# Allegro board B07_1013.brd
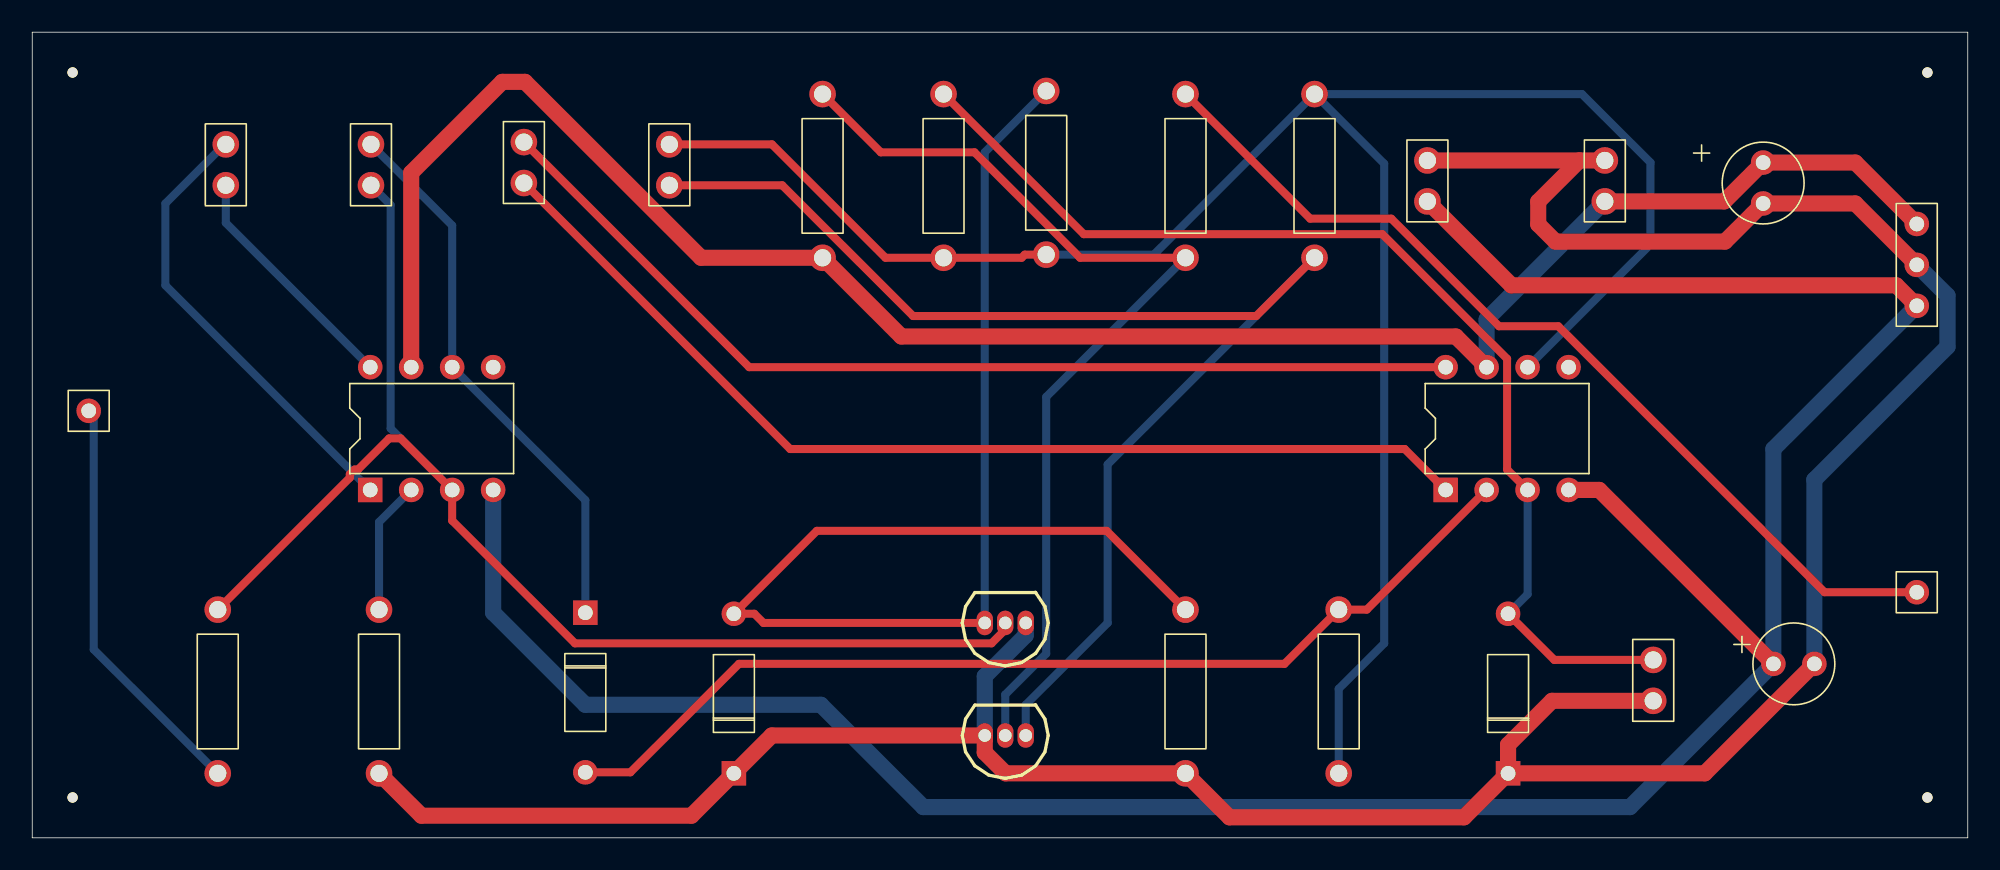
[diagram p0: board, top side]
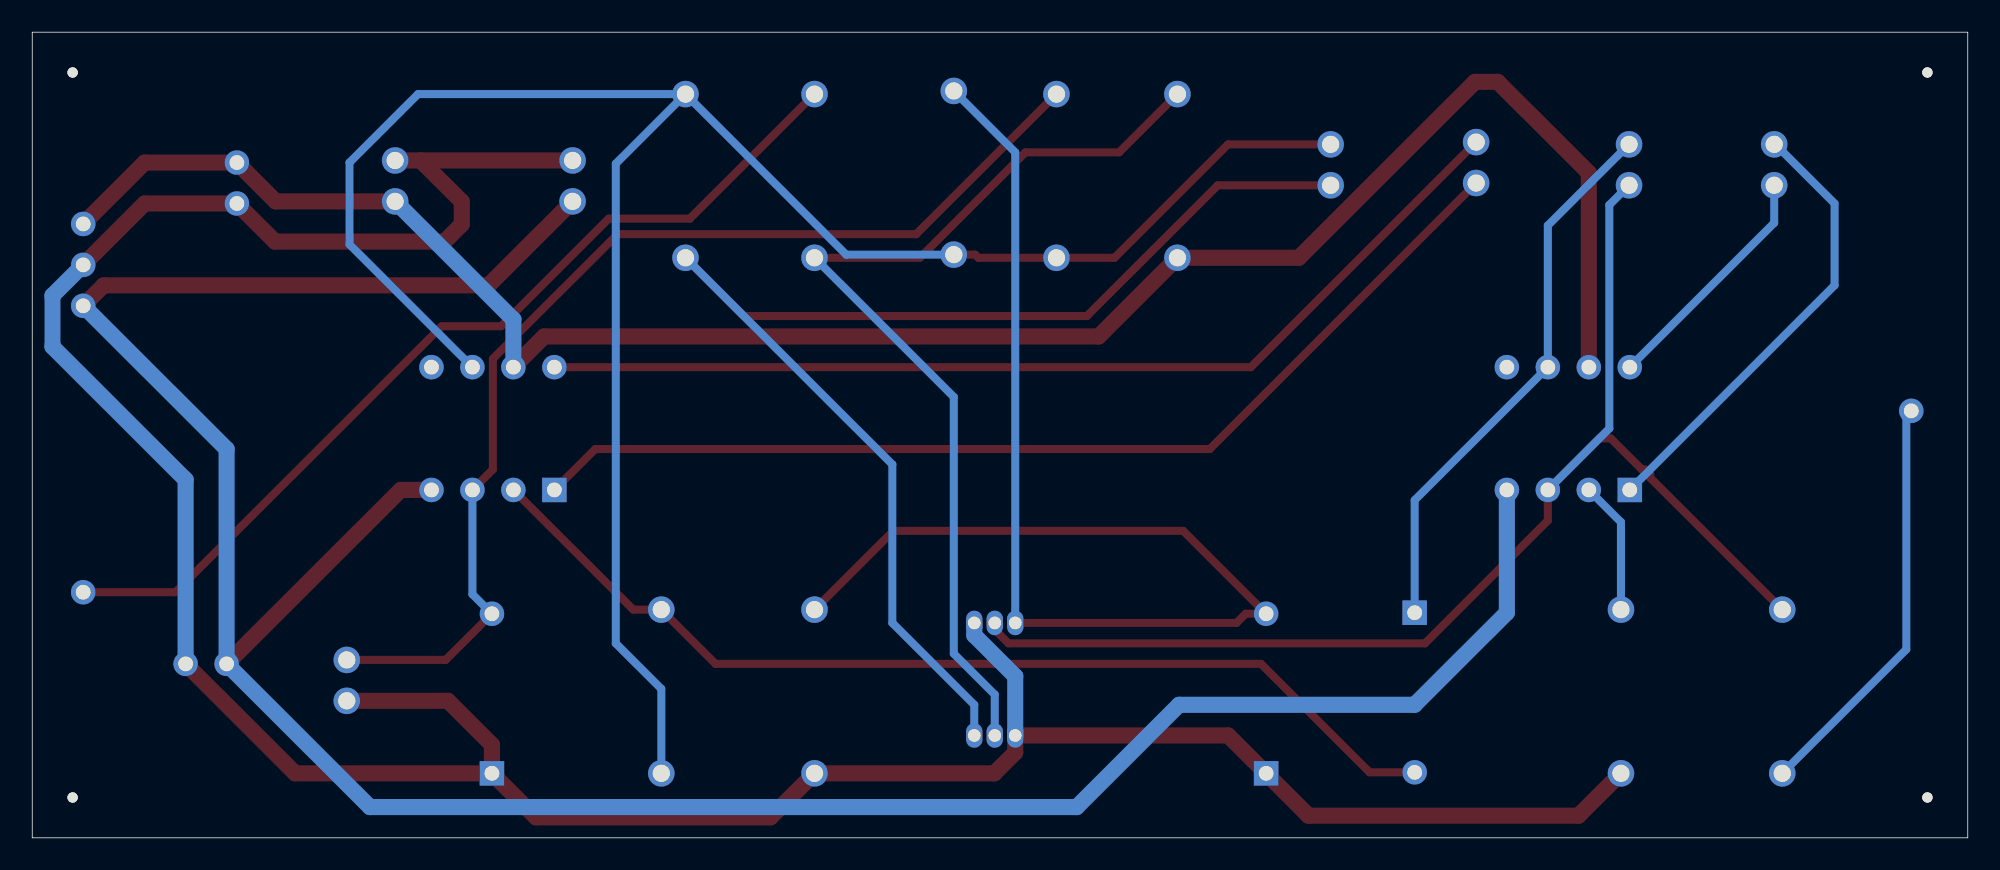
[diagram p1: board, bottom side, seen from below]

Outline 120 x 50 mm; copper layers: TOP, BOTTOM. Coordinates in mm from the lower left corner of the outline.
Outline path: 0,50 0,0 120,0 120,50 0,50

## Design rules (mm)
constraint set DEFAULT: min track width 0.5
nets with their own width: min track width 1; nets +12V -12V GND

## Placement (name value [footprint] x y rotation side)
C1  CAP NP  [CAPCK05]  12 40.5 0 top
C2  CAP NP  [CAPCK05]  86.5 39.5 0 top
C3  CAP NP  [CAPCK05]  21 40.5 0 top
C4  CAP NP  [CAPCK05]  97.5 39.5 0 top
C5  CAP NP  [CAPCK05]  100.5 8.5 0 top
C6  CAP NP  [CAPCK05]  39.5 40.5 0 top
C7  CAP NP  [CAPCK05]  30.48 43.18 180 top
C8  CAP POL  [CAP196]  107.95 10.79 270 top
C9  CAP POL  [CAP196]  107.31 41.91 180 top
D1  DIODE  [DO41]  91.5 4 0 top
D2  DIODE  [DO41]  34.29 13.97 180 top
D3  DIODE  [DO41]  43.5 4 0 top
J1  CON1  [JUMPER1]  3.5 26.5 0 top
J2  CON3  [JUMPER3]  116.84 38.1 270 top
J3  CON1  [JUMPER1]  116.84 15.24 0 top
NOREF  -  [unnamed]  117.5 2.5 0 top
NOREF#2  -  [#2]  0 33.12 0 top
NOREF#3  -  [unnamed]  2.5 47.5 0 top
NOREF#4  -  [#2]  11.84 0 90 top
NOREF#5  -  [unnamed]  2.5 2.5 0 top
NOREF#6  -  [unnamed]  117.5 47.5 0 top
Q1  NPN BCE  [TO92]  61.59 13.34 180 top
Q2  NPN BCE  [TO92]  61.59 6.35 180 top
R1  R  [RES400]  11.5 4 0 top
R2  R  [RES400]  21.5 4 0 top
R3  R  [RES400]  71.5 4 0 top
R4  R  [RES400]  81 4 0 top
R5  R  [RES400]  62.87 36.2 0 top
R7  R  [RES400]  71.5 36 0 top
R8  R  [RES400]  79.5 36 0 top
R9  R  [RES400]  56.5 36 0 top
R10  R  [RES400]  49 36 0 top
U1  LM741  [DIP8_3]  20.95 21.59 90 top
U2  LM741  [DIP8_3]  87.63 21.59 90 top

## Library data of the parts
C1-C7 = CAP NP: Tolerance: ***; User Part Number: ***
C8 C9 = CAP POL: Tolerance: ***; User Part Number: ***
D1-D3 = DIODE
J1 J3 = CON1: User Part Number: ***
J2 = CON3: User Part Number: ***
Q1 Q2 = NPN BCE
R1-R5 R7-R10 = R: Tolerance: ***; User Part Number: ***
U1 U2 = LM741_0: Tolerance: ***; User Part Number: ***

## Footprints (pads in the part's own frame, mm; a bottom-side part is the same pattern mirrored in y, then rotated)
CAP196
  round 1.524 hole 0.914: 1(0,0) 2(0,2.54)
CAPCK05
  round 1.651 hole 1.067: 1(0,0) 2(0,2.54)
DIP8_3
  rect 1.524x1.524 hole 0.914: 1(0,0)
  round 1.524 hole 0.914: 2(0,-2.54) 3(0,-5.08) 4(0,-7.62) 5(7.62,-7.62) 6(7.62,-5.08) 7(7.62,-2.54) 8(7.62,0)
DO41
  rect 1.524x1.524 hole 0.914: 1(0,0)
  round 1.524 hole 0.914: 2(0,9.906)
JUMPER1
  round 1.524 hole 0.914: 1(0,0)
JUMPER3
  round 1.524 hole 0.914: 1(0,0) 2(2.54,0) 3(5.08,0)
RES400
  round 1.651 hole 1.067: 1(0,0) 2(0,10.16)
TO92
  oval 1.016x1.524 hole 0.787: 1(0,0) 2(1.27,0) 3(2.54,0)
unnamed
  round 0.635 hole 3.175 unplated: (0,0)

## Nets
+12V: C4.1 C9.1 J2.1 R10.1 U1.7 U2.7
-12V: C2.1 C8.1 J2.3 U1.4(V-) U2.4(V-)
GND: C2.2 C4.2 C5.1 C8.2 C9.2 D1.1(K) D3.1(K) J2.2 Q1.1 Q2.3(E) R2.1 R3.1
N00852: J1.1 R1.1
N00856: C3.1 Q1.2 R1.2 U1.3
N00860: R2.2 U1.2
N00907: C3.2 D2.1(K) U1.6
N00957: C1.2 U1.1
N00969: C1.1 U1.8
N01031: D2.2 R4.2 U2.2
N01055: D3.2 Q1.3(E) R3.2 R5.2
N01167: C7.2 U2.1
N01188: C7.1 U2.8
N01210: C6.2 R4.1 R5.1 R8.2 R9.1 U2.6
N01332: C5.2 D1.2 R9.2 U2.3
N01445: C6.1 Q2.1 R8.1
N01494: Q2.2 R7.1 R10.2
N01501: J3.1 R7.2

Pads without a net: U1 5; U2 5

## Routing (per net, layer and track width the routed paths; a pad name or vN(x,y) marks a point on that pad's centre or on a via; arc(x,y) is an arc through that point)
+12V: length 123.7
  TOP w1: J2.1 113.03,41.91 C9.1 104.91,39.5 C4.1 ; 23.5,29.21 23.5,41.27 29.14,46.92 30.55,46.92 41.47,36 R10.1 53.88,31.11 88.27,31.11 U2.7
  BOTTOM w1: U2.7 90.17,32.17 C4.1
-12V: length 171.8
  TOP w1: J2.3 115.57,34.29 91.71,34.29 C2.1 ; C8.1 97.16,21.59 U2.4
  BOTTOM w1: U1.4 28.57,13.97 34.29,8.26 48.9,8.26 55.24,1.91 99.06,1.91 C8.1 107.95,24.13 J2.3
GND: length 190.9
  TOP w1: C5.1 94.22,8.5 91.5,5.78 D1.1 ; 95.92,42.04 93.37,39.49 93.37,38.08 94.44,37.01 104.95,37.01 C9.2 113.03,39.37 J2.2 ; 95.92,42.04 C4.2 ; 95.92,42.04 C2.2 ; R2.1 24.13,1.37 40.87,1.37 D3.1 45.85,6.35 Q2.3 59.05,5.29 60.35,4 R3.1 74.23,1.27 88.77,1.27 D1.1 ; C8.2 103.69,4 D1.1
  BOTTOM w0.5: R3.1 71.56,4 ; R2.1 22.04,4 ; D3.1 43.5,4.12
  BOTTOM w1: Q2.3 59.05,10.03 61.59,12.57 Q1.1 ; C8.2 110.49,22.23 118.75,30.48 118.75,33.66 J2.2
N00852: length 26.2
  TOP w0.5: J1.1 3.35,26.34
  BOTTOM w0.5: R1.1 3.81,11.69 3.81,26.5 J1.1
N00856: length 81.5
  TOP w0.5: Q1.2 60.33,12.92 59.47,12.07 33.65,12.07 26.04,19.68 26.04,21.59 22.84,24.79 22.13,24.79 20.2,22.86 19.98,22.86 19.69,22.56 19.69,22.35 R1.2
  BOTTOM w0.5: C3.1 22.22,39.28 22.22,25.4 26.04,21.59
N00860: length 8.3
  BOTTOM w0.5: R2.2 21.5,19.59 23.5,21.59
N00907: length 34.6
  BOTTOM w0.5: C3.2 26.04,38.01 26.04,29.21 34.29,20.95 D2.1
N00957: length 28.5
  TOP w0.5: C1.2 12,43.12
  BOTTOM w0.5: C1.2 12,43.12 8.26,39.37 8.26,34.29 U1.1
N00969: length 15
  BOTTOM w0.5: C1.1 12,38.16 U1.8
N01031: length 63.1
  TOP w0.5: U2.2 82.74,14.16 R4.2 77.64,10.79 43.81,10.79 37.08,4.06 D2.2
N01055: length 82.5
  TOP w0.5: Q1.3 45.34,13.34 44.77,13.91 D3.2 48.64,19.05 66.61,19.05 R3.2
  BOTTOM w0.5: Q1.3 59.05,42.55 R5.2
N01167: length 65
  TOP w0.5: U2.1 85.09,24.13 46.99,24.13 C7.2
N01188: length 62.9
  TOP w0.5: U2.8 44.45,29.21 C7.1
N01210: length 130.7
  TOP w0.5: C6.2 45.86,43.04 52.9,36 R9.1 61.34,36 61.54,36.2 R5.1
  BOTTOM w0.5: R8.2 96.08,46.16 100.33,41.91 100.33,36.83 U2.6 ; R8.2 69.53,36.2 R5.1 ; R8.2 83.82,41.84 83.82,12.06 81,9.24 R4.1
N01332: length 68.8
  TOP w0.5: D1.2 94.37,11.04 C5.2 ; U2.3 91.44,22.86 91.44,29.73 83.71,37.47 65.19,37.47 R9.2
  BOTTOM w0.5: U2.3 92.71,15.12 D1.2
N01445: length 81.9
  TOP w0.5: C6.1 46.49,40.5 54.61,32.38 75.89,32.38 R8.1
  BOTTOM w0.5: R8.1 66.67,23.18 66.67,13.34 61.59,8.26 Q2.1
N01494: length 61
  TOP w0.5: R10.2 52.62,42.55 58.42,42.55 64.97,36 R7.1
  BOTTOM w0.5: R7.1 62.87,27.36 62.87,11.43 60.33,8.89 Q2.2
N01501: length 58.1
  TOP w0.5: J3.1 111.12,15.24 94.61,31.75 90.94,31.75 84.26,38.43 79.23,38.43 R7.2

## Text on the board
COMPVAL_TYPE_TOP: FIGURE | FINISHED_SIZE | 0.7874 | 0.9144 | 1.0668 | 3.175 | DRILL CHART: TOP to BOTTOM | ALL UNITS ARE IN MILLIMETERS | PLATED | NON-PLATED | QTY | 4 | 2 | 31 | 32
